# EAGLE board v1 (EAGLE 7.3.0)
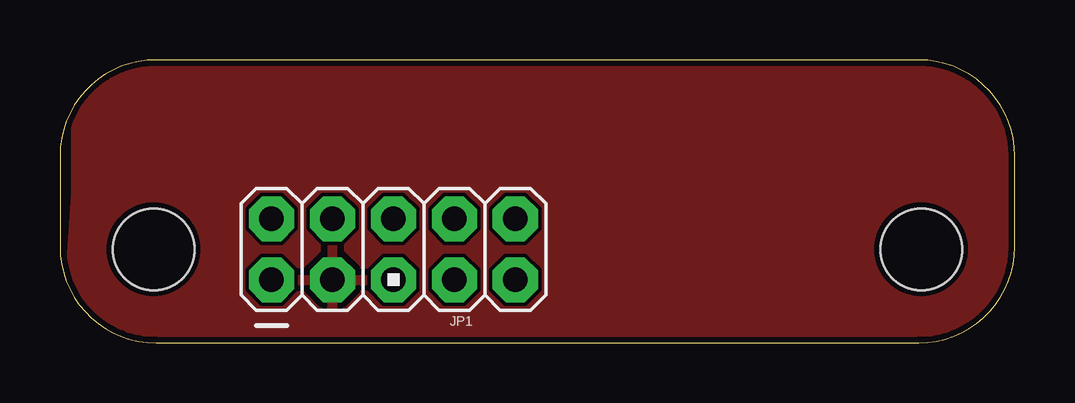
[diagram p0: board, top side]
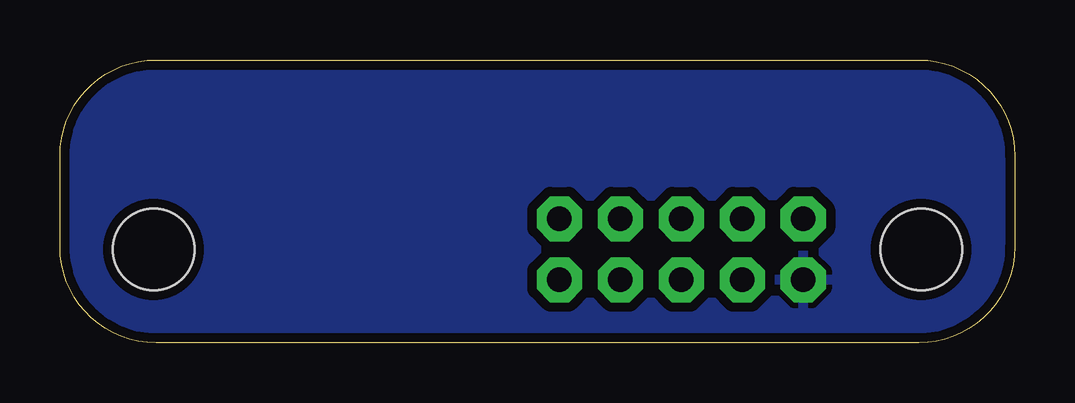
[diagram p1: board, bottom side, seen from below]

Size 39.8 x 11.8 mm. Coordinates in mm from the lower left corner, seen from the top.
Outline: 0,7.8 0,4 arc90 4,0 35.8,0 arc90 39.8,4 39.8,7.8 arc90 35.8,11.8 4,11.8 arc90 0,7.8
Copper layers (1*16): Top 0.035mm / dielectric 1.5mm / Bottom 0.035mm
Design rules "DFRobot_Eagle_Rule_v0.4": minimum track width 6mil, minimum drill 12mil, track to track 6mil, track to pad 6mil, pad to pad 6mil, via to via 6mil, smd to smd 0mil, copper to edge 10mil, drill to drill 10mil, minimum pad ring 12mil, minimum via ring 8mil, stop-mask expansion 2mil, vias tented up to drill 25mil, thermal gap 10mil
Holes 3.4 mm at 3.9,3.9 35.9,3.9

## Footprints (pad centres in the part's own frame; a part is rotated, then mirrored left to right if it is on the bottom)
AVR_ICSP = drill 1.016 pad 1.88 octagon: 1 -1.27,5.08; 2 1.27,5.08; 3 -1.27,2.54; 4 1.27,2.54; 5 -1.27,0; 6 1.27,0; 7 -1.27,-2.54; 8 1.27,-2.54; 9 -1.27,-5.08; 10 1.27,-5.08

## Placement (x,y rotation side)
JP1  [AVR_ICSP]  13.9,3.9 90 top

## Library data of the parts
JP1 = SparkFun-Connectors

## Nets
GND: JP1.1
VDD: JP1.3

## Tracks (layer width: path | path; a pad name or v marks a point on that pad's centre or on a via)
GND
  pour Bottom (isolate 0.4): 0.15,0.25 39.45,0.25 39.45,11.3 0.35,11.3 0.35,6.1
VDD
  pour Top: 0.25,0.25 39.5,0.25 39.5,11.35 0.65,11.35 0.65,6.2